# EAGLE board logo_keychain (EAGLE 6.3)
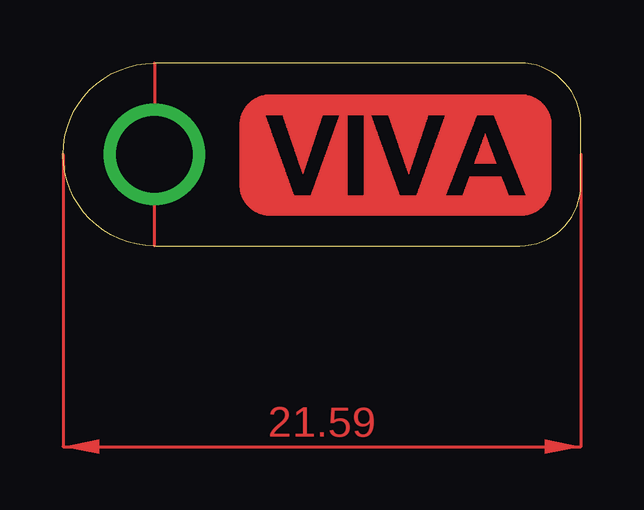
[diagram p0: board, top side]
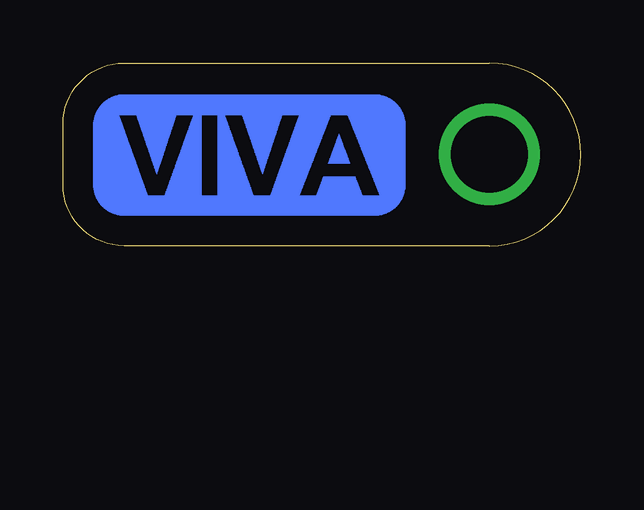
[diagram p1: board, bottom side, seen from below]

Size 21.59 x 7.62 mm. Coordinates in mm from the lower left corner, seen from the top.
Outline: 3.81,0 19.05,0 arc90 21.59,2.54 21.59,5.08 arc90 19.05,7.62 3.81,7.62 arc180 3.81,0
Copper layers (1*16): Top 0.035mm / dielectric 1.5mm / Bottom 0.035mm
Design rules "default": minimum track width 10mil, minimum drill 24mil, track to track 8mil, track to pad 8mil, pad to pad 8mil, via to via 8mil, smd to smd 8mil, copper to edge 40mil, drill to drill 8mil, minimum pad ring 10mil, minimum via ring 8mil, stop-mask expansion 4mil, vias tented up to drill 0mil, thermal gap 10mil

## Placement (x,y rotation side)
E$1  [VIVA_LOGO]  20.32,1.27 0 bottom
E$2  [VIVA_LOGO]  7.37,1.27 0 top

## Library data of the parts
E$1 E$2 = nolan-utsa

## Tracks (layer width: path | path; a pad name or v marks a point on that pad's centre or on a via)
S$1  (via drill 3.2)
  other vias: 3.81,3.81
(copper drawn outside any net)
  shapes: Top area x2